# Altium PCB touch-2ch-v2.PcbDoc
Units mm, origin at the board's own origin, x right, y up, seen from the top; angles counter-clockwise.
Board outline 90.83 x 39.88 mm, 2 copper layers (Top Layer, Bottom Layer); 32 components, 34 nets, 81 pads, 0 vias.
Unrouted connection lines stored in the file: 1.
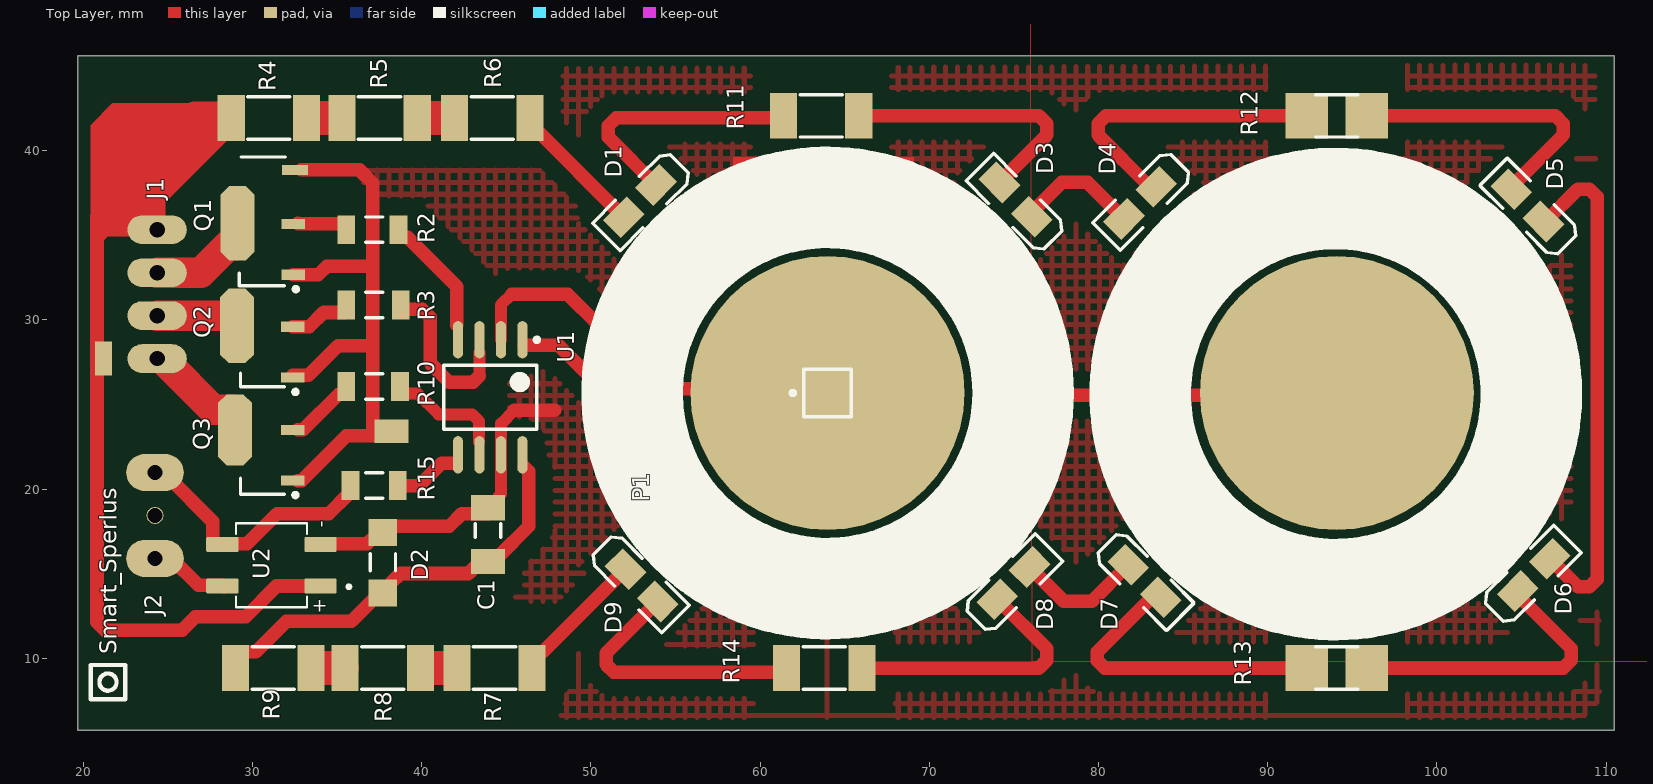
[diagram p0: Top Layer view]
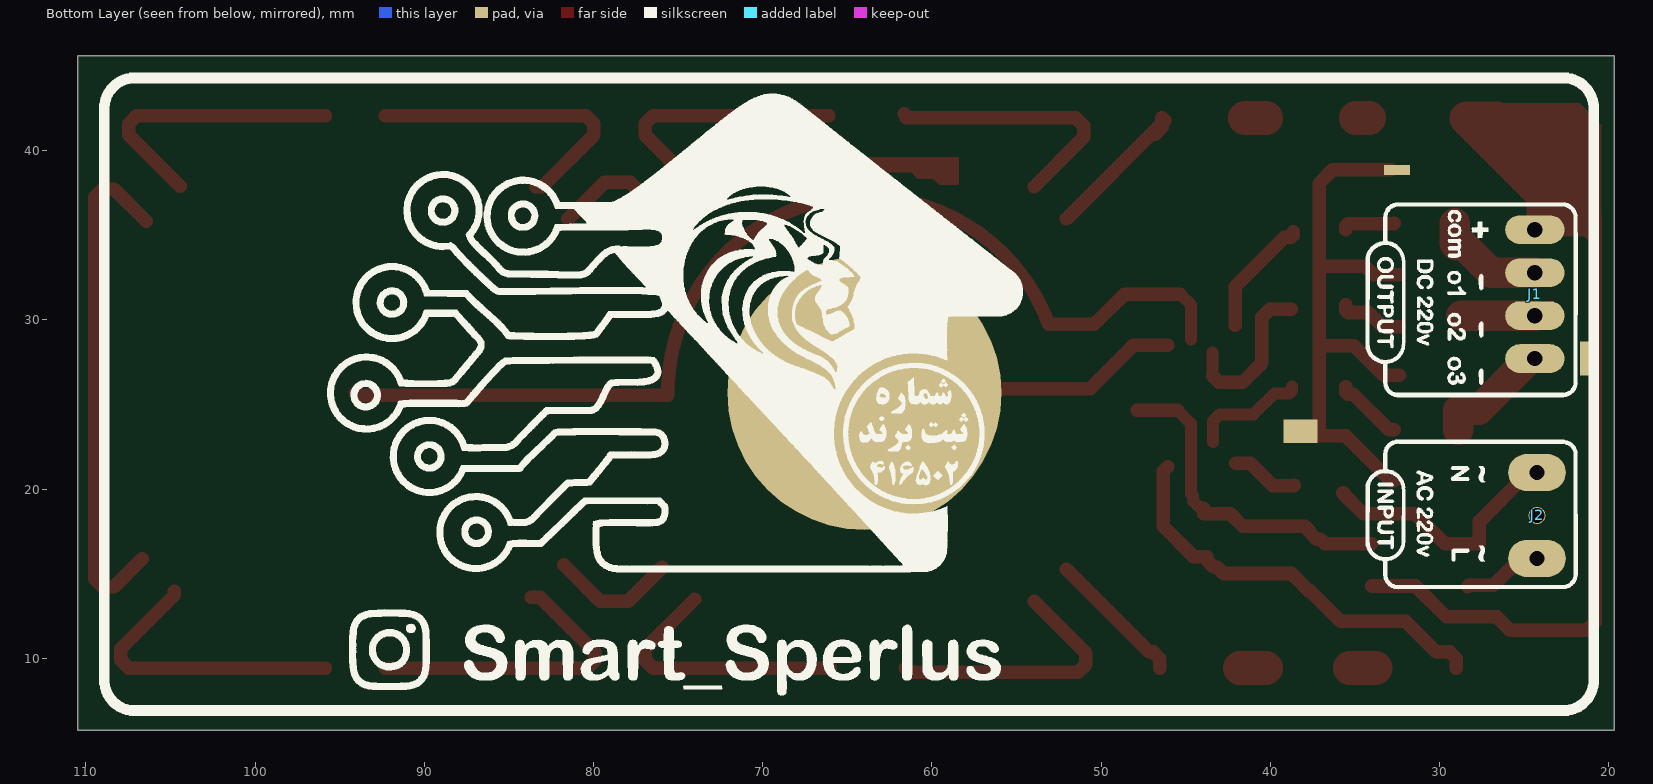
[diagram p1: Bottom Layer view, seen from below]
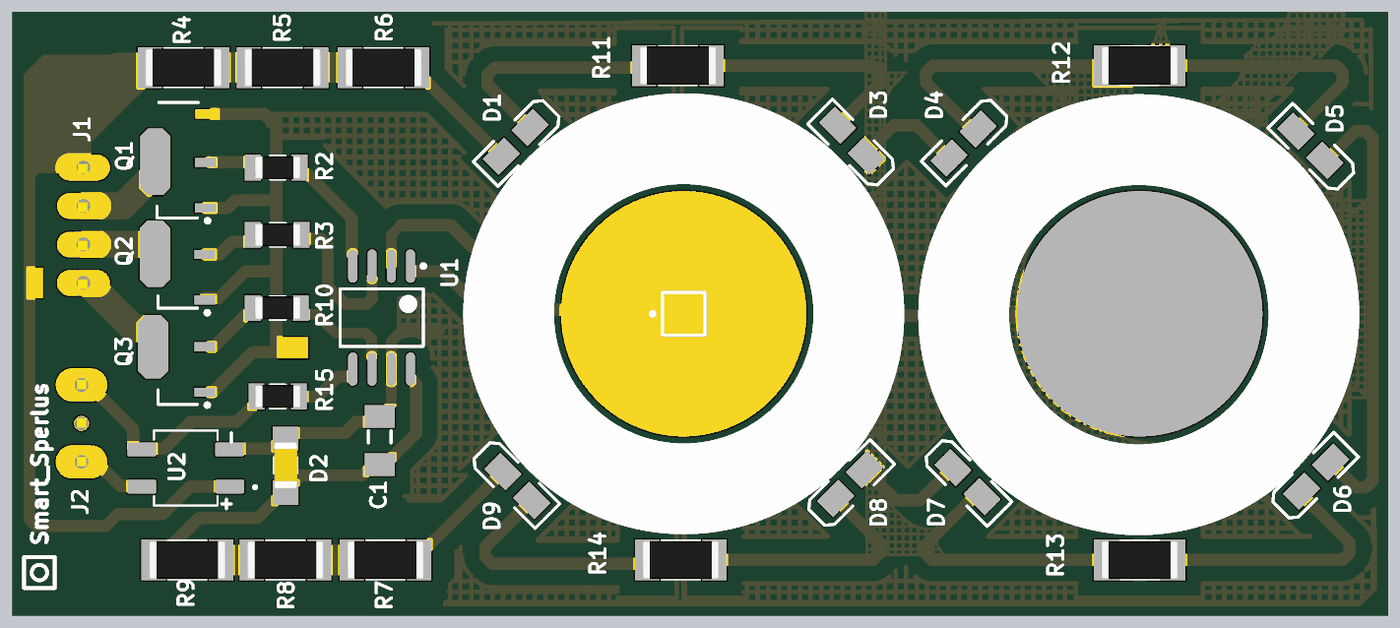
[diagram p2: 3D render of the assembled board from above, using the file's embedded part models]

## Layer stack, top to bottom
Top Solder: solder mask 0.0102, Solder Resist, Dk 3.5
Top Layer: signal copper 0.0356
Dielectric 1: dielectric 0.32, FR-4, Dk 4.8
Bottom Layer: signal copper 0.0356
Bottom Solder: solder mask 0.0102, Solder Resist, Dk 3.5

## Board outline
110.49,5.738 19.663,5.738 19.663,45.616 110.49,45.616

## Design rules (kind name [scope] priority, off if disabled: settings)
Clearance Clearance_1 [InPolygon] p1: gap=1 ignorepadtopadclearanceinfootprint=FALSE
Clearance [All] p2: gap=0.6 ignorepadtopadclearanceinfootprint=FALSE
PolygonConnect [All] p1: connectstyle=Relief reliefconductorwidth=0.254 reliefentries=4 polygonreliefangle="90 Angle" airgapwidth=0.254
RoomDefinition touch-2ch [InComponentClass('touch-2ch')] p1: confinementstyle=ConfineIn formatcopy=TRUE lockcomponents=FALSE outline 116.078,-4.953 247.904,-4.953 247.904,23.114 116.078,23.114
RoutingLayers [All] p1: top layer_v5=FALSE bottom layer_v5=TRUE
RoutingVias [All] p1: holewidth=0.711 width=2.5 viastyle="Through Hole" minholewidth=0.711 minwidth=1.27 maxholewidth=0.711 maxwidth=2
SolderMaskExpansion [All] p1: expansion=0.102 istentingtop=FALSE
Width [All] p1: maxlimit=3 minlimit=0.5 preferedwidth=1
29 further rules are at their usual default settings.

## Components (designator, comment, footprint, x,y, rotation, side; value= is the part's Value field where it differs from the comment)
C1 "=Value" "CAP 1206" 37.697,15.644 r90 top
D1 "LED2" 3.2X1.6X1.1#1 52.959,36.957 r45 top
D2 "Diode" C1206 43.92,17.549 r270 top
D3 "LED2" 3.2X1.6X1.1#2 75.035,36.98 r315 top
D4 "LED2" 3.2X1.6X1.1#3 82.528,36.98 r45 top
D5 "LED2" 3.2X1.6X1.1#3 105.41,36.703 r315 top
D6 "LED2" 3.2X1.6X1.1#1 105.664,14.986 r225 top
D7 "LED2" 3.2X1.6X1.1#4 82.782,14.501 r135 top
D8 "LED2" 3.2X1.6X1.1#4 75.035,14.501 r225 top
D9 "LED2" 3.2X1.6X1.1#3 52.937,14.374 r135 top
J1 "Header4X1" "HEADER 4X1" 24.362,35.329 r270 bottom
J2 "Header3X1" "HEADER 3X1" 24.235,15.898 r90 bottom
P1 "Plug" PIN1 63.986,25.677 r90 top
Q1 "Triac" SOT89N#1 30.607,34.163 r180 top
Q2 "Triac" SOT89N#1 30.585,28.091 r180 top (schematic designator Q1)
Q3 "Triac" SOT89N#2 30.585,21.995 r180 top
R2 "10K" "RES 1206 (3216X08L)"#1 37.189,35.329 r180 top
R3 "10K" "RES 1206 (3216X08L)"#2 37.189,30.884 r180 top
R4 "10K" "RES 2010 (5026X08L)"#1 30.966,41.933 r0 top
R5 "10K" "RES 2010 (5026X08L)"#1 37.509,41.933 r0 top
R6 "10K" "RES 2010 (5026X08L)"#1 44.174,41.933 r0 top
R7 "10K" "RES 2010 (5026X08L)"#1 44.301,9.421 r180 top
R8 "10K" "RES 2010 (5026X08L)"#1 37.697,9.421 r180 top
R9 "10K" "RES 2010 (5026X08L)"#1 31.22,9.421 r180 top
R10 "10K" "RES 1206 (3216X08L)"#3 37.189,26.058 r180 top
R11 "10K" "RES 2010 (5026X08L)"#1 63.605,42.06 r0 top
R12 "10K" "RES 2010 (5026X08L)"#2 94.086,42.06 r0 top
R13 "10K" "RES 2010 (5026X08L)"#3 94.086,9.421 r180 top
R14 "10K" "RES 2010 (5026X08L)"#1 63.793,9.421 r180 top
R15 "10K" "RES 1206 (3216X08L)"#4 37.189,20.216 r0 top
U1 "ATtiny15L-1SC" 8S2_N 44.047,25.423 r270 top
U2 "MB6S" SOIC245P670X270-4N 31.115,15.494 r180 top

## Footprints (in the part's own frame and the unit in brackets; to place one, negate y for a bottom-side part, rotate by r counter-clockwise, add the part's x,y. Pads: shape width x height; smd on the part's side, far side on the other; paste and mask are expansions set on the pad)
3.2X1.6X1.1#1 [mm] "SMT LED; 2 Flat Leads"
  rect 2x1.5 smd: 1(-1.347,0.09) 2(1.347,0.09)
  silkscreen extent -2.9,-1.15 3.2,1.15
3.2X1.6X1.1#2 [mm] "SMT LED; 2 Flat Leads"
  rect 2x1.5 smd: 1(-1.437,0.18) 2(1.347,0.09)
  silkscreen extent -2.9,-1.15 3.2,1.15
3.2X1.6X1.1#3 [mm] "SMT LED; 2 Flat Leads"
  rect 2x1.5 smd: 1(-1.437,0) 2(1.257,0)
  silkscreen extent -2.9,-1.15 3.2,1.15
3.2X1.6X1.1#4 [mm] "SMT LED; 2 Flat Leads"
  rect 2x1.5 smd: 1(-1.257,0) 2(1.437,0)
  silkscreen extent -2.9,-1.15 3.2,1.15
8S2_N [mm] "SOP, 8-Leads, Body 5.3x5.3mm, Pitch 1.27mm, IPC Medium Density"
  oval 2.2x0.6 smd: 1(-3.4,1.905) 2(-3.4,0.635) 3(-3.4,-0.635) 4(-3.4,-1.905) 5(3.4,-1.905) 6(3.4,-0.635) 7(3.4,0.635) 8(3.4,1.905)
  silkscreen extent -3.52,-2.75 1.9,2.88, body extent -2.73,-2.75 2.73,2.75, height 2.16
C1206 [mm] "Chip Capacitor, Body 3.2x1.6mm, IPC High Density"
  rect 1.5x2 smd: 1(-1.35,0) 2(1.83,0)
  silkscreen extent -0.4,-0.75 0.4,0.75, body extent -1.7,-0.9 1.7,0.9, height 1.3
"CAP 1206" [mm]
  rect 1.6x1.7 smd: 1(-1.778,0) 2(1.778,0)
  silkscreen extent -0.47,-0.75 0.53,0.75, body extent -1.49,-0.77 1.55,0.75, height 0.75
"HEADER 3X1" [mm]
  oval 2.2x3.4 hole 0.9: 1(0,0) 3(5.08,0)
  round 1 hole 0.9: 2(2.54,0)
  body extent -1.24,-1.27 6.38,1.27, height 8.38
"HEADER 4X1" [mm]
  oval 1.7x3.5 hole 0.9: 1(0,0) 2(2.54,0) 3(5.08,0) 4(7.62,0)
  body extent -1.19,-1.22 8.97,1.32, height 8.38
PIN1 [mm] "Connector; Plug"
  round 16.2 all layers, no hole: 1(0,0)
  silkscreen extent -1.4,-1.4 1.4,2.17
"RES 1206 (3216X08L)"#1 [mm] "Chip Resistor, 2-Leads, Body 3.2x1.6mm, IPC High Density _ (0.125 W)"
  rect 1.05x1.7 smd: 1(-1.44,0) 2(1.651,0)
  silkscreen extent -0.5,-0.75 0.5,0.75, body extent -1.52,-0.76 1.53,0.76, height 0.6
"RES 1206 (3216X08L)"#2 [mm] "Chip Resistor, 2-Leads, Body 3.2x1.6mm, IPC High Density _ (0.125 W)"
  rect 1.05x1.7 smd: 1(-1.567,0) 2(1.651,0)
  silkscreen extent -0.5,-0.75 0.5,0.75, body extent -1.52,-0.76 1.53,0.76, height 0.6
"RES 1206 (3216X08L)"#3 [mm] "Chip Resistor, 2-Leads, Body 3.2x1.6mm, IPC High Density _ (0.125 W)"
  rect 1.05x1.7 smd: 1(-1.524,0) 2(1.651,0)
  silkscreen extent -0.5,-0.75 0.5,0.75, body extent -1.52,-0.76 1.53,0.76, height 0.6
"RES 1206 (3216X08L)"#4 [mm] "Chip Resistor, 2-Leads, Body 3.2x1.6mm, IPC High Density _ (0.125 W)"
  rect 1.05x1.7 smd: 1(-1.397,0) 2(1.397,0)
  silkscreen extent -0.5,-0.75 0.5,0.75, body extent -1.52,-0.76 1.53,0.76, height 0.6
"RES 2010 (5026X08L)"#1 [mm] "Chip Resistor, 2-Leads, Body 5.0x2.6mm, IPC High Density _ (0.250 W)"
  rect 1.6x2.7 smd: 1(-2.225,0) 2(2.225,0)
  silkscreen extent -1.25,-1.25 1.25,1.25, body extent -2.54,-1.27 2.54,1.27, height 0.6
"RES 2010 (5026X08L)"#2 [mm] "Chip Resistor, 2-Leads, Body 5.0x2.6mm, IPC High Density _ (0.250 W)"
  rect 2.5x2.7 smd: 1(-1.779,0) 2(1.777,0)
  silkscreen extent -1.25,-1.25 1.25,1.25, body extent -2.54,-1.27 2.54,1.27, height 0.6
"RES 2010 (5026X08L)"#3 [mm] "Chip Resistor, 2-Leads, Body 5.0x2.6mm, IPC High Density _ (0.250 W)"
  rect 2.5x2.7 smd: 1(-1.777,0) 2(1.779,0)
  silkscreen extent -1.25,-1.25 1.25,1.25, body extent -2.54,-1.27 2.54,1.27, height 0.6
SOIC245P670X270-4N [mm]
  rrect23% 1.91x0.91 smd: 1(-2.9,1.225) 2(-2.9,-1.225) 3(2.9,-1.225) 4(2.9,1.225)
  silkscreen extent -4.68,-2.48 2.1,2.48
SOT89N#1 [mm] "SOT89, 3-Leads, Body 4.5x2.4 mm, Pitch 1.5mm, Lead Span 4.1mm, IPC Medium Density"
  rect 1.4x0.6 smd: 1(-1.8,1.5) 3(-1.8,-1.5)
  oct 2x4.4 smd: 2(1.502,-1.548)
  silkscreen extent -2.07,-5.46 1.27,2.47, body extent -1.3,-2.3 1.3,2.3, height 1.6
SOT89N#2 [mm] "SOT89, 3-Leads, Body 4.5x2.4 mm, Pitch 1.5mm, Lead Span 4.1mm, IPC Medium Density"
  rect 1.4x0.6 smd: 1(-1.8,1.5) 3(-1.8,-1.5)
  oct 2x4.2 smd: 2(1.629,-1.5)
  silkscreen extent -2.07,1.35 1.3,2.47, body extent -1.3,-2.3 1.3,2.3, height 1.6

## Part data
C1: library part Capacitor, "Capacitor"
D1 D3 D4 D5 D6 D7 D8 D9: "Typical RED, GREEN, YELLOW, AMBER GaAs LED", LatestRevisionDate=17-Jul-2002, LatestRevisionNote="Re-released for DXP Platform.", PackageDescription="SM LED; 2 Flat Leads", PackageReference=3.2X1.6X1.1, PackageVersion=Feb-2002, Published=8-Jun-2000, Publisher="Altium Limited"
D2: "Default Diode", Code_JEDEC=DO-214-AB, LatestRevisionDate=17-Jul-2002, LatestRevisionNote="Re-released for DXP Platform.", PackageDescription="DO-214-AB/SMC; 2 C-Bend Leads; Body 7.9 x 5.9 mm, inc. leads (LxW)", PackageReference=SMC, PackageVersion=Sep-1996, Published=8-Jun-2000, Publisher="Altium Limited"
Q1 Q2 Q3: "Silicon Bidirectional Triode Thyristor", ComponentLink1Description="Manufacturer Link", ComponentLink1URL=http://www.motorola.com/, DatasheetVersion=1999, LatestRevisionDate=17-Jul-2002, LatestRevisionNote="Re-released for DXP Platform.", Note="Pin 2 is electrically connected to Pin 4 (TAB)", PackageDescription="TO, Thru-Hole, Vertical, Heatsink Mounted; 3 In-Line Leads; Pitch 2.28 mm", PackageReference=369-03, Published=29-Sep-2000, Publisher="Altium Limited"
R2 R3 R4 R5 R6 R7 R8 R9 R10 R11 R12 R13 R14 R15: library part Resistor, "Resistor", Power="1/4 W", Tolerance=5%
U1: "8-Bit AVR Microcontroller with 1K Byte of Flash Memory", Supplier Part Number 1=ATTINY15L-1SC-ND, ComponentLink1Description=Datasheet, ComponentLink1URL=http://www.atmel.com/dyn/resources/prod_documents/doc1187.pdf, ComponentLink2Description="Atmel.com Home", ComponentLink2URL=http://www.atmel.com, DatasheetVersion=1187E-AVR-06/02, LatestRevisionDate=16-Oct-2006, LatestRevisionNote="IPC-7351 Footprint Added.", PackageDescription="8-Lead, 0.208\" Body, Plastic Small Outline Package (EIAJ)", PackageReference=8S2, PackageVersion="revF, Apr-2008", Published=17-Sep-2003, Publisher="Altium Limited", Supplier 1=Digi-Key, Supplier 2=Mouser, Supplier Part Number 2=556-ATTINY15L1SC
U2: "Bridge Rectifier Single Phase Standard 600V Surface Mount 4-SOIC", Package="BESOP-4 Surge Components", Digi-Key_Part_Number=MB6SCT-ND, Digi-Key_Purchase_URL=https://www.digikey.com.tr/product-detail/en/on-semiconductor/MB6S/MB6SCT-ND/965654?utm_source=snapeda&utm_medium=aggregator&utm_campaign=symbol, MF="ON Semiconductor", MP=MB6S, SnapEDA_Link=https://www.snapeda.com/parts/MB6S/ON%20Semiconductor/view-part/2774209/?ref=snap
P1: LatestRevisionDate=17-Jul-2002, LatestRevisionNote="Re-released for DXP Platform.", Publisher="Altium Limited"

## Free pads (board coordinates)
  rect 2x1.4 all layers, no hole: 156(38.205,23.424)
  round 16.2 smd: 157(94.086,25.677)
  rect 1x2 all layers, no hole: 160(21.187,27.709)
  rect 1.524x0.6 all layers, no hole: 163(32.512,38.862)

## Nets (pads, with @x,y where several pads share a name; then routed paths per layer and width w, separated by ;. In a path a pad name is that pad's centre, name@x,y a point inside that pad or via, vN(x,y) a via of type N, cw(c..) or ccw(c..) an arc to the next point about the centre after c; other vN are vias at no path point)
GND: C1.2 D2.1 pad.156 pad.163 Q1.1 Q2.1 Q3.1 U1.7 U2.2 | length 55.5
  Top Layer w0.7: D2.1 44.17,18.899 44.569,19.299 44.569,19.597 44.682,19.709 U1.7 44.692,22.033 44.692,23.872 45.48,24.661
  Top Layer w0.8: Q2.1@32.384,26.717 33.299,26.717 35.053,28.471 37.103,28.471 ; Q1.1 33.888,32.663 34.394,33.17 37.103,33.17 ; Q3.1@32.685,20.495 32.896,20.495 35.537,23.137 37.103,23.137 ; pad.163@32.874,38.862 36.322,38.862 37.103,38.081 37.103,33.17 ; U2.2@33.997,16.764 36.778,16.764 37.035,17.022 37.247,17.022 37.697,17.472 37.697,17.549 37.951,17.803 41.634,17.803 42.38,18.549 D2.1@43.92,18.549 ; pad.156@37.604,23.137 37.103,23.137 ; 45.48,24.661 47.857,24.661 ; 37.103,23.137 37.103,28.471 ; 37.103,28.471 37.103,33.17
NetD1_1: D1.1 R6.2 | length 9.3
  Top Layer w0.8: R6.2@46.228,41.783 R6.2@46.399,41.613 ; R6.2 R6.2@46.399,41.613 ; R6.2@46.798,40.983 46.399,41.383 R6.2@46.399,41.613 ; D1.1@52.048,35.964 R6.2@46.399,41.613
NetD1_2: D1.2 R11.1 | length 15.7
  Top Layer w0.8: D1.2@53.953,37.869 51.02,40.801 51.02,41.464 51.489,41.933 R11.1@61.507,41.933 ; R11.1@61.507,42.06 R11.1@61.634,42.187
NetD3_1: D3.1 R11.2 | length 15.7
  Top Layer w0.8: R11.2@66.084,42.06 76.482,42.06 76.951,41.591 76.951,40.928 D3.1
NetD3_2: D3.2 D4.1 | length 7.3
  Top Layer w0.8: D3.2 76.051,36.345 77.829,38.123 79.352,38.123 D4.1
NetD4_2: D4.2 R12.1 | length 17.9
  Top Layer w0.8: D4.2 83.036,37.869 79.976,40.928 79.976,41.591 80.445,42.06 R12.1
NetD5_1: D5.1 R12.2 | length 16.8
  Top Layer w0.8: R12.2 107.007,42.06 107.476,41.591 107.476,40.928 D5.1@104.438,37.89
NetD5_2: D5.2 D6.1 | length 30.3
  Top Layer w0.8: D5.2@106.433,35.821 108.343,37.731 109.005,37.731 109.474,37.262 109.474,14.681 109.005,14.212 108.343,14.212 D6.1
NetD6_2: D6.2 R13.1 | length 17.7
  Top Layer w0.8: R13.1 107.47,9.421 107.939,9.889 107.939,10.552 104.775,13.716 D6.2
NetD7_1: D7.1 R13.2 | length 18.1
  Top Layer w0.8: D7.1 83.163,13.612 79.939,10.388 79.939,9.85 80.369,9.421 R13.2
NetD7_2: D7.2 D8.1 | length 7.6
  Top Layer w0.8: D8.1 77.956,13.358 79.606,13.358 D7.2
NetD8_2: D8.2 R14.1 | length 15.9
  Top Layer w0.8: R14.1 76.482,9.421 76.951,9.889 76.951,10.552 D8.2
NetD9_1: D9.1 R14.2 | length 16
  Top Layer w0.8: D9.1 50.893,10.298 50.893,9.635 51.362,9.167 61.314,9.167 R14.2
NetD9_2: D9.2 R7.1 | length 8.3
  Top Layer w0.8: R7.1 46.526,9.971 46.925,10.37 47.155,10.37 D9.2
NetJ1_2: J1.2 Q1.2 | length 6.7
  Top Layer w1.8: J1.2 26.947,32.789 28.569,34.411 29.005,34.411 29.105,34.511 Q1.2
NetJ1_3: J1.3 Q2.2 | length 4.3
  Top Layer w1.8: J1.3 Q2.2@28.702,30.249
NetJ1_4: J1.4 Q3.2 | length 6.4
  Top Layer w1.8: J1.4@24.83,27.548 27.683,24.695 28.856,24.695 28.883,24.668 Q3.2@28.883,23.495
NetJ2_1: J2.1 U2.4 | length 4.8
  Top Layer w0.8: J2.1 25.213,15.898 26.806,14.305 28.257,14.305 U2.4@28.338,14.224
NetJ2_3: J2.3 R15.1 U2.3 | length 15.7
  Top Layer w0.8: J2.3@23.713,20.737 24.983,20.737 27.638,18.083 27.638,16.764 29.673,16.764 31.451,18.542 34.499,18.542 35.667,19.71 35.667,19.766 R15.1@35.723,19.766
NetP1_1: P1.1 U1.1 | length 18
  Top Layer w0.8: U1.1@46.052,28.487 48.094,28.487 50.651,25.931 P1.1@62.97,25.931
NetQ1_3: Q1.3 R2.2 | length 3.1
  Top Layer w0.8: Q1.3@32.685,35.714 32.712,35.687 35.413,35.687 35.538,35.562 R2.2
NetQ2_3: Q2.3 R3.2 | length 3.9
  Top Layer w0.8: Q2.3 33.356,29.591 34.198,30.434 35.413,30.434 35.538,30.559 R3.2
NetQ3_3: Q3.3 R10.2 | length 4.1
  Top Layer w0.8: Q3.3@32.685,23.495 32.975,23.495 35.088,25.608 35.413,25.608 35.538,25.733 R10.2
NetR4_2: R4.2 R5.1 | length 0.8
  Top Layer w2: 34.163,41.933 R5.1@34.925,41.933
NetR5_2: R5.2 R6.1 | length 1.3
  Top Layer w2: R5.2@40.237,41.933 R6.1@41.507,41.933
NetR7_2: R7.2 R8.1 | length 1.5
  Top Layer w2: R8.1@40.259,9.421 R7.2@41.783,9.421
NetR8_2: R8.2 R9.1 | length 1.5
  Top Layer w2: R9.1@33.782,9.421 R8.2@35.306,9.421
o1: pad.157 U1.2 | length 62.5
  Top Layer w0.7: U1.2 44.682,30.884 45.317,31.519
  Top Layer w0.8: 45.317,31.519 48.619,31.519 50.397,29.741 53.064,29.741 ; 53.091,29.73 cw(c63.986,25.677) 75.609,25.554 93.963,25.554 pad.157
o2: R2.1 U1.4 | length 7.2
  Top Layer w0.8: R2.1@38.628,35.202 38.628,35.004 38.753,34.879 39.162,34.879 42.081,31.96 U1.4@42.081,29.674
o3: R3.1 U1.3 | length 9.6
  Top Layer w0.7: 43.412,26.693 U1.3@43.412,28.073
  Top Layer w0.8: R3.1@38.756,30.63 40.022,30.63 40.491,30.161 40.491,27.455 41.634,26.312 43.031,26.312 43.412,26.693
o4: R10.1 U1.6 | length 6.9
  Top Layer w0.7: R10.1 38.713,25.82 38.887,25.645 39.76,25.645 40.999,24.407 42.981,24.407 43.392,23.996 U1.6@43.392,22.772
o5: R15.2 U1.5 | length 4
  Top Layer w0.8: R15.2 38.599,20.202 39.842,20.202 41.171,21.531 U1.5@42.041,21.531
vcc: C1.1 D2.2 R9.2 U1.8 | length 24.8
  Top Layer w0.8: R9.2 28.995,9.971 29.395,10.37 30.182,10.37 32.004,12.192 35.846,12.192 37.647,13.993 C1.1@37.697,13.993 ; C1.1@37.747,13.993 38.146,14.393 38.146,14.413 38.742,15.009 42.759,15.009 43.119,15.369 43.32,15.369 43.759,15.808 43.759,16.009 44.538,16.009 46.333,17.803 46.333,21.042 U1.8@46.052,21.323
VDD: J1.1 pad.160 R4.1 U2.1 | length 56
  Top Layer w0.8: 26.625,41.91 20.806,36.091 20.806,27.709 20.806,12.131 21.274,11.663 25.842,11.663 26.625,12.446 29.591,12.446 31.414,14.269 U2.1
  Top Layer w2: 23.854,36.218 23.854,37.361 28.403,41.91 26.625,41.91
pads on no net: J2.2

## Polygon pours and split planes (outlines as drawn)
GND on Top Layer "GND_L01_P054" (hatched 90Degree grid 0.7 track 0.3, remove dead copper, pour order 54): 48.238,6.5 108.585,6.5 109.601,7.516 109.336,44.461 108.722,45.075 47.476,44.843 47.476,43.584 48.111,42.949 48.111,39.266 47.707,38.862 36.3,38.862 36.3,38.377 36.935,37.742 36.935,37.107 39.983,37.107 45.19,31.9 45.19,13.993 45.825,13.358 47.984,13.358 49,12.342 49,8.278 48.238,7.516
GND on Top Layer "NONET_L01_P024" (hatched 90Degree grid 0.5 track 0.2, shelved, pour order 24): 75.946,71.374 115.697,71.374 115.57,71.247 115.57,9.779 76.073,9.779

## Keep-outs
Keep-Out Layer:
  lines w0.7: 0,-0.381 0,85 150,85 150,0 0,0

## Other copper
Top Layer:
  region net GND: 58.42,39.624 69.088,39.624 69.088,37.846 68.834,38.1 67.945,38.1 67.564,38.481 66.548,38.481 66.294,38.735 61.214,38.735 60.833,38.354 59.944,38.354 59.563,37.973 58.42,37.973
  region net VDD: 20.425,34.617 20.425,41.507 21.717,42.799 27.305,42.799 27.305,40.05 24.489,37.234 24.235,37.234 24.235,34.948 24.108,34.821 23.981,34.948 21.441,34.948 20.806,34.313

## Silkscreen, mask and mechanical layers (free items; w line width, h text height)
Top Overlay:
  circle w6: c63.986,25.677 r11.557
  circle w6: c94.024,25.615 r11.557
  circle w0.254: c21.455,8.589 r0.508
  lines w0.2: 29.21,32.766 29.21,32.004 31.877,32.004 ; 29.285,26.045 29.285,26.849
  lines w0.254: 20.439,7.573 22.471,7.573 22.471,9.605 20.439,9.605 20.439,7.573
  text "Smart_Sperlus" at 21.963,10.24 h1 r90
Bottom Overlay:
  drawing of 87 lines, arcs and shapes, not listed
Bottom Solder:
  the board outline again, w0.2

## Text inside footprints (layer, text, board x,y; h text height)
U2: Top Overlay "-" at 33.804,18.138 h0.81 r270; Top Overlay "+" at 34.439,13.439 h0.81 r180